# Altium PCB VFD LCD.PcbDoc
Units mm, origin at the board's own origin, x right, y up, seen from the top; angles counter-clockwise.
Board outline 150.37 x 53.47 mm, 2 copper layers (Top Layer, Bottom Layer), stack 1.671 mm thick; 69 components, 46 nets, 247 pads, 80 vias.
Unrouted connection lines stored in the file: 128.
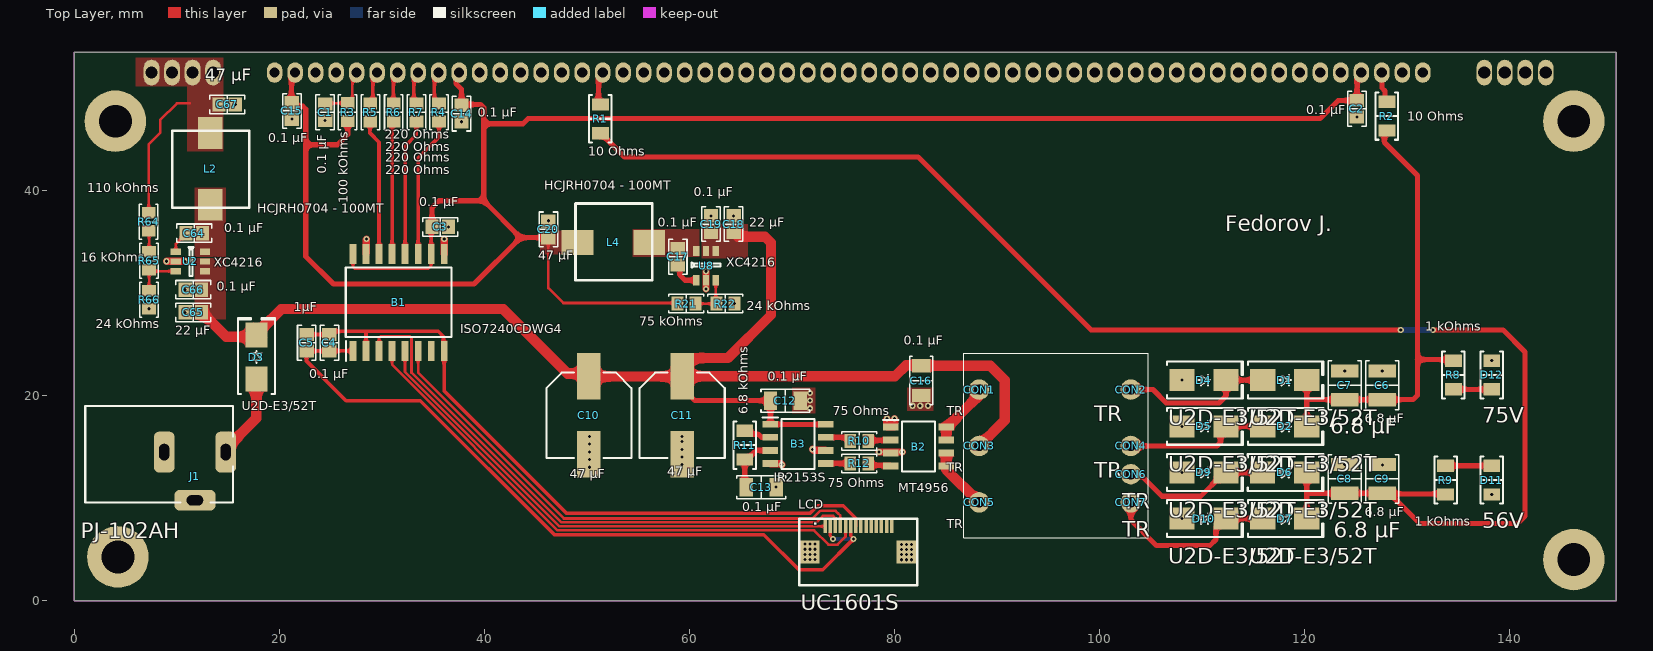
[diagram p0: Top Layer view]
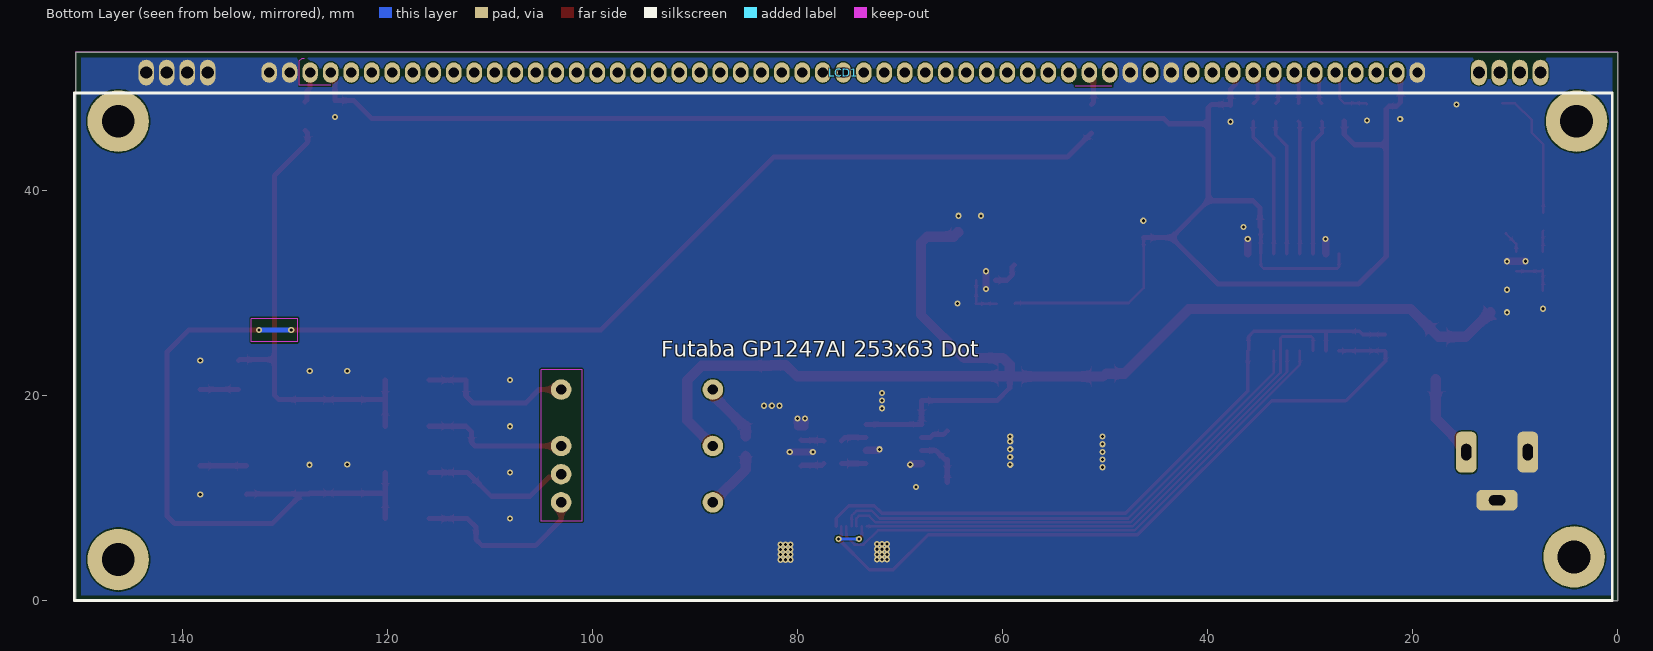
[diagram p1: Bottom Layer view, seen from below]
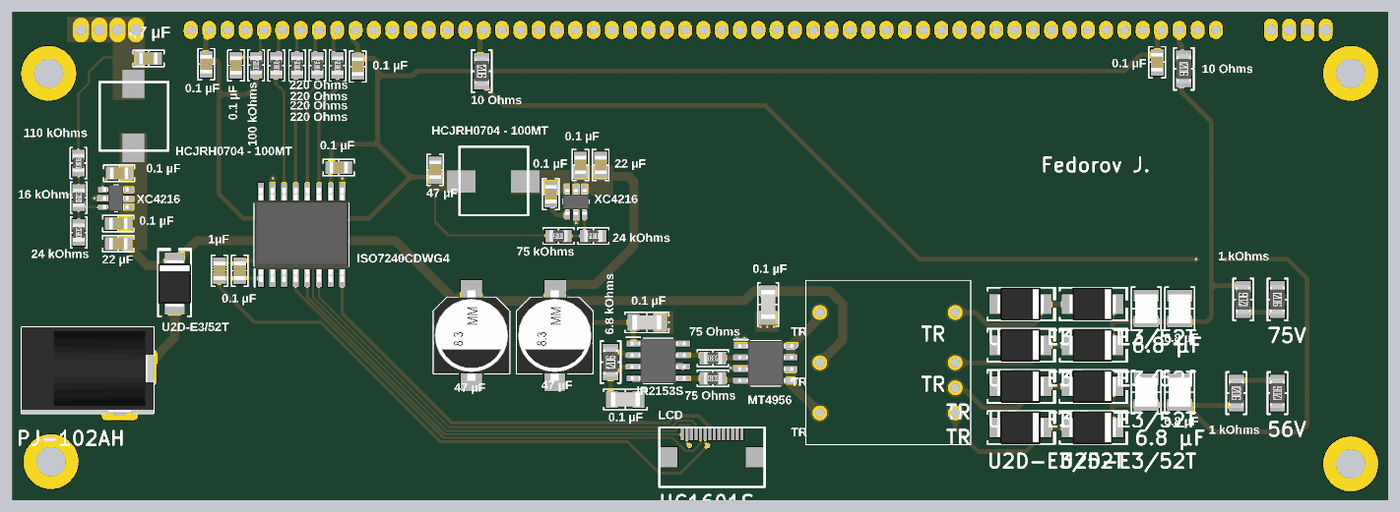
[diagram p2: 3D render of the assembled board from above, using the file's embedded part models]

## Layer stack, top to bottom
Top Solder: solder mask 0.0102, Solder Resist, Dk 3.5
Top Layer: signal copper 0.0356
Dielectric 1: dielectric 1.6, FR-4, Dk 4.8
Bottom Layer: signal copper 0.0356
Bottom Solder: solder mask 0.0102, Solder Resist, Dk 3.5

## Board outline
0,0 0,53.467 150.368,53.467 150.368,0

## Design rules (kind name [scope] priority, off if disabled: settings)
AssemblyTestPointUsage [All] p1 off:
AssemblyTestpoint [All] p1 off: testpointundercomponent=TRUE minsize=1.016 maxsize=2.54 preferedsize=1.524 minholesize=0 maxholesize=1.016 preferedholesize=0.813 testpointgrid=0.025 usegrid=TRUE gridtolerance=0 allowsidetop=TRUE allowsidebottom=TRUE
BoardOutlineClearance [All] p1: gap=0.5 ignorepadtopadclearanceinfootprint=FALSE
Clearance [All] p1: gap=0.127 ignorepadtopadclearanceinfootprint=FALSE
ComponentClearance [All] p1: gap=0.254 collisioncheckmode=3 verticalgap=-0.254 showdistances=FALSE
FabricationTestPointUsage [All] p1 off: valid=0 allowmultiple=FALSE
FabricationTestpoint [All] p1 off: side=3 testpointundercomponent=TRUE minsize=1.016 maxsize=2.54 preferedsize=1.524 minholesize=0 maxholesize=1.016 preferedholesize=0.813 testpointgrid=0.025 allowsidetop=TRUE allowsidebottom=TRUE usegrid=TRUE gridtolerance=0
FanoutControl Fanout_Default [All] p1: bgadir=Out bgaviamode=Centered fanoutstyle=Auto fanoutdirection=Alternating viagrid=0.025 // Fanout_Default (Default Rule)
FanoutControl Fanout_Small [(CompPinCount < 5)] p2: bgadir=Out bgaviamode=Centered fanoutstyle=Auto fanoutdirection=OutThenIn viagrid=0.025 // Fanout_Small (Default Rule)
FanoutControl Fanout_LCC [IsLCC] p4: bgadir=Out bgaviamode=Centered fanoutstyle=Auto fanoutdirection=Alternating viagrid=0.025 // Fanout_LCC (Default Rule)
FanoutControl Fanout_BGA [IsBGA] p5: bgadir=Out bgaviamode=Centered fanoutstyle=Auto fanoutdirection=Alternating viagrid=0.025 // Fanout_BGA (Default Rule)
HoleSize [All] p1: absolutevalues=TRUE maxlimit=2.54 minlimit=0.3 maxpercent=80.000 minpercent=20.000
HoleToHoleClearance [All] p1: gap=0.5 allowstackedmicrovias=TRUE
MinimumAnnularRing [All] p1: minimumring=0.128
PolygonConnect [All] p1: connectstyle=Direct reliefconductorwidth=0.254 reliefentries=4 polygonreliefangle="90 Angle" airgapwidth=0.254
RoutingVias [All] p1: holewidth=0.3 width=0.3 viastyle="Through Hole" minholewidth=0.3 minwidth=0.8 maxholewidth=4 maxwidth=4
SilkToSolderMaskClearance [IsPad] p1: minsilkscreentomaskgap=0.128 clearancetoexposedcopper=TRUE
SolderMaskExpansion [All] p1: expansion=0.102 istentingtop=FALSE
SolderMaskExpansion SolderMaskExpansion_GNDVIA [IsVia and InNet('GND')] p2: expansion=0.102 istentingtop=TRUE
SupplyNets "Schematic Supply Nets_9" [InNet('+3.3')] p1: voltage=0.000
SupplyNets "Schematic Supply Nets_8" [InNet('GND')] p2: voltage=0.000
SupplyNets "Schematic Supply Nets_7" [InNet('+75')] p3: voltage=0.000
SupplyNets "Schematic Supply Nets_6" [InNet('+12')] p4: voltage=0.000
SupplyNets "Schematic Supply Nets_5" [InNet('LCD_GND')] p5: voltage=0.000
SupplyNets "Schematic Supply Nets_4" [InNet('+5')] p6: voltage=0.000
SupplyNets "Schematic Supply Nets_3" [InNet('3V3_ISO')] p7: voltage=0.000
SupplyNets "Schematic Supply Nets_2" [InNet('GND_ISO')] p8: voltage=0.000
SupplyNets "Schematic Supply Nets_1" [InNet('VLCD')] p9: voltage=0.000
SupplyNets "Schematic Supply Nets" [InNet('+55')] p10: voltage=0.000
UnRoutedNet [All] p1: checkbadconnections=TRUE
Width [All] p1: maxlimit=4 minlimit=0.254 preferedwidth=0.4 minimp=50.000000 maximp=50.000000 favimp=50.000000
17 further rules are at their usual default settings.

## Classes and differential pairs
component class "VFD LCD": B1 B2 B3 C1 C2 C3 C4 C5 C6 C7 C8 C9 C10 C11 C12 C13 C14 C15 C16 CON1 CON2 CON3 CON4 CON5 CON6 CON7 D1 D2 D3 D4 D5 D6 D7 D9 D10 D11 D12 J1 LCD LCD1 R1 R2 R3 R4 R5 R6 R7 R8 R9 R10 R11 R12
component class U_XC4216_DC_DC5V: C64 C65 C66 C67 L2 R64 R65 R66 U2
component class U_XC4216_DC_DC3.3V: C17 C18 C19 C20 L4 R21 R22 U8

## Components (designator, comment, footprint, x,y, rotation, side; value= is the part's Value field where it differs from the comment)
B1 "ISO7240CDWG4" SOIC127P1030X265-16N 31.623,29.083 r90 top
B2 "MT4956" SOIC127P600X175-8N 82.341,15.022 r0 top
B3 "IR2153S" SOIC127P600X175-8N 70.593,15.276 r0 top
C1 "0.1 µF" "CAP 0805_2012" 24.457,47.625 r90 top
C2 "0.1 µF" "CAP 0805_2012" 125.095,47.968 r90 top
C3 "0.1 µF" "CAP 0805_2012" 35.687,36.449 r0 top
C4 "0.1 µF" "CAP 0805_2012" 24.869,25.146 r90 top
C5 "1µF" "CAP 0805_2012" 22.664,25.146 r270 top
C6 "6.8 µF" "CAP 1210_3225 - 1MM" 127.568,20.991 r270 top
C7 "6.8 µF" "CAP 1210_3225 - 1MM" 123.913,20.991 r270 top
C8 "6.8 µF" "CAP 1210_3225 - 1MM" 123.913,11.864 r270 top
C9 "6.8 µF" "CAP 1210_3225 - 1MM" 127.568,11.864 r270 top
C10 "47 µF" "CAP ALSMD 8.3MM H10.5MM" 50.186,18.07 r270 top
C11 "47 µF" "CAP ALSMD 8.3MM H10.5MM" 59.29,18.07 r270 top
C12 "0.1 µF" "CAP 1206_3216 - 0.8MM" 69.35,19.495 r180 top
C13 "0.1 µF" "CAP 1206_3216 - 0.8MM" 67,11.057 r180 top
C14 "0.1 µF" "CAP 0805_2012" 37.764,47.498 r90 top
C15 "0.1 µF" "CAP 0805_2012" 21.209,47.752 r90 top
C16 "0.1 µF" "CAP 1206_3216 - 0.8MM" 82.6,21.45 r90 top
C17 "0.1 µF" "CAP 0805_2012" 58.857,33.528 r90 top
C18 "22 µF" "CAP 0805_2012" 64.307,36.723 r270 top
C19 "0.1 µF" "CAP 0805_2012" 62.103,36.723 r270 top
C20 "47 µF" "CAP 0805_2012" 46.228,36.195 r270 top
C64 "0.1 µF" "CAP 0805_2012" 11.693,35.824 r0 top
C65 "22 µF" "CAP 0805_2012" 11.604,28.112 r0 top
C66 "0.1 µF" "CAP 0805_2012" 11.604,30.316 r0 top
C67 "47 µF" "CAP 0805_2012" 14.906,48.383 r180 top
CON1 "TR" "one contact 0,8_1.6" 88.25,20.575 r90 top
CON2 "TR" "one contact 0,8_1.6" 103.05,20.575 r90 top
CON3 "TR" "one contact 0,8_1.6" 88.25,15.075 r90 top
CON4 "TR" "one contact 0,8_1.6" 103.05,15.075 r90 top
CON5 "TR" "one contact 0,8_1.6" 88.25,9.575 r90 top
CON6 "TR" "one contact 0,8_1.6" 103.05,12.325 r90 top
CON7 "TR" "one contact 0,8_1.6" 103.05,9.575 r90 top
D1 "U2D-E3/52T" "DO214AA SMB" 118.059,21.499 r0 top
D2 "U2D-E3/52T" "DO214AA SMB" 118.059,16.995 r0 top
D3 "U2D-E3/52T" "DO214AA SMB" 17.75,23.75 r90 top
D4 "U2D-E3/52T" "DO214AA SMB" 110.18,21.499 r0 top
D5 "U2D-E3/52T" "DO214AA SMB" 110.18,16.995 r0 top
D6 "U2D-E3/52T" "DO214AA SMB" 118.05,12.49 r0 top
D7 "U2D-E3/52T" "DO214AA SMB" 118.059,7.986 r0 top
D9 "U2D-E3/52T" "DO214AA SMB" 110.171,12.49 r0 top
D10 "U2D-E3/52T" "DO214AA SMB" 110.171,7.986 r0 top
D11 "56V" "RES 1206_3216" 138.25,11.75 r90 top value="1 kOhms"
D12 "75V" "RES 1206_3216" 138.25,22 r270 top value="1 kOhms"
J1 "PJ-102AH" "CUI PJ-102AH" 8.263,14.478 r90 top
L2 "HCJRH0704 - 100MT" "HCJRH0704 - 100MT" 13.255,42.104 r90 top
L4 "HCJRH0704 - 100MT" "HCJRH0704 - 100MT" 52.578,34.925 r180 top
LCD "UC1601S" FPC0514 76.222,7.235 r90 top
LCD1 "GP1247AI" GP1247AI 77.528,47.5 r180 bottom
R1 "10 Ohms" "RES 1206_3216" 51.308,46.99 r270 top
R2 "10 Ohms" "RES 1206_3216" 128.016,47.244 r270 top
R3 "100 kOhms" "RES 0805_2012" 26.661,47.639 r90 top
R4 "220 Ohms" "RES 0805_2012" 35.56,47.611 r90 top
R5 "220 Ohms" "RES 0805_2012" 28.865,47.611 r90 top
R6 "220 Ohms" "RES 0805_2012" 31.151,47.611 r90 top
R7 "220 Ohms" "RES 0805_2012" 33.356,47.611 r90 top
R8 "1 kOhms" "RES 1206_3216" 134.5,22 r90 top
R9 "1 kOhms" "RES 1206_3216" 133.75,11.75 r270 top
R10 "75 Ohms" "RES 0805_2012" 76.562,15.575 r0 top
R11 "6.8 kOhms" "RES 1206_3216" 65.386,15.149 r90 top
R12 "75 Ohms" "RES 0805_2012" 76.562,13.371 r0 top
R21 "75 kOhms" "RES 0805_2012" 59.696,28.956 r180 top
R22 "24 kOhms" "RES 0805_2012" 63.5,28.956 r180 top
R64 "110 kOhms" "RES 0805_2012" 7.25,36.942 r90 top
R65 "16 kOhms" "RES 0805_2012" 7.286,33.137 r90 top
R66 "24 kOhms" "RES 0805_2012" 7.286,29.333 r90 top
U2 "XC4216" SOT-23-6 10.372,34.02 r0 top
U8 "XC4216" SOT-23-6 60.662,31.717 r90 top

## Footprints (in the part's own frame and the unit in brackets; to place one, negate y for a bottom-side part, rotate by r counter-clockwise, add the part's x,y. Pads: shape width x height; smd on the part's side, far side on the other; paste and mask are expansions set on the pad)
"CAP 0805_2012" [mm] "Chip Capacitor, 2-Leads, Body 2.00x1.20mm, IPC Medium Density"
  rect 1.3x1.4 smd: 1(-0.8,0) 2(0.8,0)
  silkscreen extent -1.7,-0.9 1.7,0.9, body extent -1,-0.64 1,0.64, height 1.26
"CAP 1206_3216 - 0.8MM" [mm] "Chip Capacitor, 2-Leads, Body 3.25x1.60mm, IPC Medium Density"
  rect 1.3x1.8 smd: 1(-1.45,0) 2(1.45,0)
  silkscreen extent -2.37,-1.12 2.37,1.12, body extent -1.6,-0.8 1.6,0.8, height 0.8
"CAP 1210_3225 - 1MM" [mm] "Chip Capacitor, 2-Leads, Body 3.20x2.50mm, IPC Medium Density"
  rect 1.3x2.7 smd: 1(-1.4,0) 2(1.4,0)
  silkscreen extent -2.37,-1.63 2.37,1.63, body extent -1.6,-1.25 1.6,1.25, height 1
"CAP ALSMD 8.3MM H10.5MM" [mm] "Aluminum Electrolytic Capacitor, Body 8.30x8.30x10.50mm, IPC Low Density"
  rect 4.55x2.3 smd: 1(-3.8,0) 2(3.8,0)
  silkscreen extent -4.15,-4.15 4.15,4.15, body extent -4.95,-4.15 4.95,4.15, height 10.5
"CUI PJ-102AH" [mm] "DC Barrel Jack W/ Switch 2.0x5.5"
  rrect50% 4x2 hole 1 slot 1.6 at 0 deg: 1(0,-6.5) 2(0,-0.5)
  rrect50% 2x4 hole 1 slot 1.6 at 90 deg: 3(-4.7,-3.5)
  silkscreen extent -4.92,-7.2 4.47,7.2, body extent -4.92,-7.2 4.47,7.2, height 11
"DO214AA SMB" [mm] "Molded Diode, 2-Leads, Body 4.31x3.62mm, IPC Medium Density"
  rect 2.45x2.15 smd: 1(-2.15,0) 2(2.15,0)
  silkscreen extent -3.6,-1.8 3.8,1.8, body extent -2.6,-1.8 2.6,1.8, height 2.4
FPC0514 [mm] "Connector"
  rect 1.3x0.35 smd: 1(0,3) 2(0,2.5) 3(0,2) 4(0,1.5) 5(0,1) 6(0,0.5) 7(0,0) 8(0,-0.5) 9(0,-1) 10(0,-1.5) 11(0,-2) 12(0,-2.5) 13(0,-3) 14(0,-3.5)
  rect 2.2x1.9 smd: 15(-2.5,4.5) 15(-2.5,-4.9)
  silkscreen extent -5.75,-6 0.75,5.5, body extent -5.88,-5.9 0.88,5.5, height 1.99
GP1247AI [mm] "Display"
  oval 1.524x2.5 hole 1.2: 1(70,4) 2(68,4) 3(66,4) 4(64,4) 62(-60,4) 63(-62,4) 64(-64,4) 65(-66,4)
  oval 1.524x2 hole 1: 5(58,4) 6(56,4) 7(54,4) 8(52,4) 9(50,4) 10(48,4) 11(46,4) 12(44,4) 13(42,4) 14(40,4) 15(38,4) 16(36,4) 17(34,4) 18(32,4) 19(30,4) 20(28,4) 21(26,4) 22(24,4) 23(22,4) 24(20,4) 25(18,4) 26(16,4) 27(14,4) 28(12,4) 29(10,4) 30(8,4) 31(6,4) 32(4,4) 33(2,4) 34(0,4) 35(-2,4) 36(-4,4) 37(-6,4) 38(-8,4) 39(-10,4) 40(-12,4) 41(-14,4) 42(-16,4) 43(-18,4) 44(-20,4) 45(-22,4) 46(-24,4) 47(-26,4) 48(-28,4) 49(-30,4) 50(-32,4) 51(-34,4) 52(-36,4) 53(-38,4) 54(-40,4) 55(-42,4) 56(-44,4) 57(-46,4) 58(-48,4) 59(-50,4) 60(-52,4) 61(-54,4)
  silkscreen extent -73,-47.5 77,2
"HCJRH0704 - 100MT" [mm] "Inductor 10UH Body 7.5*7.5*4.5mm"
  rect 3.1x2.4 smd paste+0 mask+0: 1(-3.5,0) 2(3.5,0)
  silkscreen extent -3.8,-3.8 3.7,3.7
"one contact 0,8_1.6" [mm]
  round 2 hole 1 mask-2539.97: 1(0,0)
"RES 0805_2012" [mm] "Chip Resistor, 2-Leads, Body 2.00x1.25mm, IPC Medium Density"
  rect 1.15x1.35 smd: 1(-0.875,0) 2(0.875,0)
  silkscreen extent -1.7,-0.9 1.7,0.9, body extent -1,-0.62 1,0.63, height 0.6
"RES 1206_3216" [mm] "Chip Resistor, 2-Leads, Body 3.13x1.55mm, IPC Medium Density"
  rect 1.2x1.65 smd: 1(-1.4,0) 2(1.4,0)
  silkscreen extent -2.3,-1.1 2.3,1.1, body extent -1.6,-0.8 1.6,0.8, height 0.6
SOIC127P600X175-8N [mm]
  rect 1.525x0.65 smd: 1(-2.712,1.905) 2(-2.712,0.635) 3(-2.712,-0.635) 4(-2.712,-1.905) 5(2.712,-1.905) 6(2.712,-0.635) 7(2.712,0.635) 8(2.712,1.905)
  silkscreen extent -3.47,-2.44 1.6,2.58, body extent -3,-2.44 3,2.44, height 1.75
SOIC127P1030X265-16N [mm]
  rect 1.95x0.65 smd: 1(-4.725,4.445) 2(-4.725,3.175) 3(-4.725,1.905) 4(-4.725,0.635) 5(-4.725,-0.635) 6(-4.725,-1.905) 7(-4.725,-3.175) 8(-4.725,-4.445) 9(4.725,-4.445) 10(4.725,-3.175) 11(4.725,-1.905) 12(4.725,-0.635) 13(4.725,0.635) 14(4.725,1.905) 15(4.725,3.175) 16(4.725,4.445)
  silkscreen extent -5.7,-5.15 3.4,5.15, body extent -5.17,-5.15 5.17,5.15, height 2.59
SOT-23-6 [mm]
  rect 1x0.6 smd: 1(-0.475,0) 2(-0.475,-0.95) 3(-0.475,-1.9) 4(2.375,-1.9) 5(2.375,-0.95) 6(2.375,0)
  silkscreen extent 0.76,-2.38 1.24,0.48, body extent -0.44,-2.36 2.36,0.49, height 1.35

## Part data
B1: "Digital Isolator CMOS 4-CH 25Mbps 16-Pin SOIC Tube", Manufacturer_Name="Texas Instruments", Mouser Part Number=595-ISO7240CDWG4, Arrow Part Number=ISO7240CDWG4, Arrow Price/Stock=https://www.arrow.com/en/products/iso7240cdwg4/texas-instruments, Datasheet Link=https://www.ti.com/lit/ds/symlink/iso7240c.pdf?ts=1635751768423&ref_url=https%253A%252F%252Fwww.ti.com%252Fproduct%252FISO7240C, Geometry.Height=2.65mm, Manufacturer_Part_Number=ISO7240CDWG4, Mouser Price/Stock=https://www.mouser.co.uk/ProductDetail/Texas-Instruments/ISO7240CDWG4?qs=IUbkBnfnSQLQBn7aUd6cPA%3D%3D
B2: "N-Channel PowerTrench® MOSFET / 60V, 5A, mΩ", Manufacturer_Name=Infineon, Manufacturer_Part_Number=IR2153S, Datasheet Link=http://www.infineon.com/dgdl/ir2153.pdf?fileId=5546d462533600a4015355c8c5fc16af, Geometry.Height=1.75mm
B3: "Self-Oscillating 600 V Half Bridge Driver IC with typical 0 A source and 0 A sink currents in 8 Lead SOIC package for IGBTs and MOSFETs. Also available in 8 Lead PDIP.", Manufacturer_Name=Infineon, Datasheet Link=http://www.infineon.com/dgdl/ir2153.pdf?fileId=5546d462533600a4015355c8c5fc16af, Geometry.Height=1.75mm, Manufacturer_Part_Number=IR2153S
C1 C2 C3 C4 C14 C15 C17 C19 C64 C66: library part CC0805MRX7R9BB104, "CAP CER 0.1UF 50V X7R 0805", Device Package="0805 (2012 Metric)", Manufacturer=Yageo, Operating Temperature="-55°C ~ 125°C", Supplier Part Number 1=311-4351-1-ND, Temperature Coefficient=X7R, Tolerance=±20%, Voltage - Rated=50V, Applications="General Purpose", Capacitance="0.1 µF", ComponentLink1Description=Datasheet, ComponentLink1URL=https://www.yageo.com/upload/media/product/productsearch/datasheet/mlcc/UPY-GPHC_X7R_6.3V-to-50V_18.pdf, componentlink2description="DigiKey Link", componentlink2url=https://www.digikey.com/en/products/detail/yageo/CC0805MRX7R9BB104/5884281, Lifecycle Status=Active, Minimum Order=1, Mounting Type="Surface Mount, MLCC", Package / Case="0805 (2012 Metric)", packaging=TapeAndReel, Part Number=CC0805MRX7R9BB104, Part Status=Active, partid=2475, Price=0.01, series=CC, Size / Dimension="0.079\" L x 0.049\" W (2.00mm x 1.25mm)", Supplier 1=DigiKey, Thickness (Max)="0.037\" (0.95mm)"
  C1 C2 C3 C4 C14 C15 C17 C19: lastupdated="8/26/2023 7:12:59 PM"
  C64 C66: lastupdated="2/9/2024 20:16:09"
C5: library part MM05ZC105KCZ2A, "CAP CER 1UF 10V X7R 0805", Device Package="0805 (2012 Metric)", Manufacturer="AVX Corporation", Operating Temperature="-55°C ~ 125°C", Supplier Part Number 1=478-10611-1-ND, Temperature Coefficient=X7R, Tolerance=±10%, Voltage - Rated=10V, Applications="Medical, Non-Critical", Capacitance=1µF, ComponentLink1Description=Datasheet, ComponentLink1URL=http://datasheets.avx.com/AVX-MM.pdf, componentlink2description="DigiKey Link", componentlink2url=http://digikey.com/product-detail/en/avx-corporation/MM05ZC105KCZ2A/478-10611-1-ND/7344872, lastupdated="9/2/2020 1:04:42 AM", Lifecycle Status=Active, Minimum Order=1, Mounting Type="Surface Mount, MLCC", Package / Case="0805 (2012 Metric)", packaging=TapeAndReel, Part Number=MM05ZC105KCZ2A, Part Status=Active, partid=2439, Price=0.50, series=MM, Size / Dimension="0.079\" L x 0.049\" W (2.01mm x 1.25mm)", Supplier 1=DigiKey, Thickness (Max)="0.029\" (0.74mm)"
C6 C7 C8 C9: library part CGA6P3X7S1H685K250AB, "CAP CER 6.8UF 50V X7S 1210", Device Package="1210 (3225 Metric)", Manufacturer="TDK Corporation", Operating Temperature="-55°C ~ 125°C", Ratings=AEC-Q200, Supplier Part Number 1=445-7003-1-ND, Temperature Coefficient=X7S, Tolerance=±10%, Voltage - Rated=50V, Applications=Automotive, Capacitance="6.8 µF", ComponentLink1Description=Datasheet, ComponentLink1URL=https://product.tdk.com/info/en/catalog/datasheets/mlcc_automotive_general_en.pdf?ref_disty=digikey, componentlink2description="DigiKey Link", componentlink2url=https://www.digikey.com/en/products/detail/tdk-corporation/CGA6P3X7S1H685K250AB/2672896, lastupdated="6/4/2024 7:21:03 PM", Lifecycle Status=Active, Minimum Order=1, Mounting Type="Surface Mount, MLCC", Package / Case="1210 (3225 Metric)", packaging=TapeAndReel, Part Number=CGA6P3X7S1H685K250AB, Part Status=Active, partid=23852, Price=0.32, series=CGA, Size / Dimension="0.126\" L x 0.098\" W (3.20mm x 2.50mm)", Supplier 1=DigiKey, Thickness (Max)="0.110\" (2.80mm)"
C10 C11: library part 63SGV47M8X10.5, "CAP ALUM 47UF 20% 63V SMD", Device Package="Radial, Can - SMD", Lifetime @ Temp.="2000 Hrs @ 105°C", Manufacturer=Rubycon, Operating Temperature="-40°C ~ 105°C", Ratings=AEC-Q200, Ripple Current @ High Frequency="180 mA @ 10 kHz", Ripple Current @ Low Frequency="120 mA @ 120 Hz", Supplier Part Number 1=1189-2505-1-ND, Tolerance=±20%, Voltage - Rated="63 V", Applications=Automotive, Capacitance="47 µF", ComponentLink1Description=Datasheet, ComponentLink1URL=http://www.rubycon.co.jp/en/catalog/e_pdfs/aluminum/e_sgv.pdf, componentlink2description="DigiKey Link", componentlink2url=https://www.digikey.com/en/products/detail/rubycon/63SGV47M8X10-5/3568703, Height - Seated (Max)="0.413\" (10.50mm)", lastupdated="8/26/2023 8:37:59 PM", Lifecycle Status=Active, Minimum Order=1, Mounting Type="Surface Mount", Package / Case="Radial, Can - SMD", packaging=TapeAndReel, Part Number=63SGV47M8X10.5, Part Status=Active, partid=7644, Polarization=Polar, Price=0.20, series=SGV, Size / Dimension="0.315\" Dia (8.00mm)", Supplier 1=DigiKey, Surface Mount Land Size="0.327\" L x 0.327\" W (8.30mm x 8.30mm)"
C12 C13 C16: library part CC1206MRY5V9BB104, "CAP CER 0.1UF 50V Y5V 1206", Device Package="1206 (3216 Metric)", Manufacturer=Yageo, Operating Temperature="-30°C ~ 85°C", Supplier Part Number 1=311-4504-1-ND, Temperature Coefficient="Y5V (F)", Tolerance=±20%, Voltage - Rated=50V, Applications="General Purpose", Capacitance="0.1 µF", ComponentLink1Description=Datasheet, ComponentLink1URL=http://www.yageo.com/documents/recent/UPY-GPHC_Y5V_6.3V-to-50V_8.pdf, componentlink2description="DigiKey Link", componentlink2url=https://www.digikey.com/en/products/detail/yageo/CC1206MRY5V9BB104/5884674, lastupdated="6/4/2024 7:10:39 PM", Lifecycle Status=Active, Minimum Order=1, Mounting Type="Surface Mount, MLCC", Package / Case="1206 (3216 Metric)", packaging=TapeAndReel, Part Number=CC1206MRY5V9BB104, Part Status=Active, partid=18711, Price=0.04, series=CC, Size / Dimension="0.126\" L x 0.063\" W (3.20mm x 1.60mm)", Supplier 1=DigiKey, Thickness (Max)="0.028\" (0.70mm)"
C18 C65: library part C2012X6S0J226M125AB, "CAP CER 22UF 6.3V X6S 0805", Device Package="0805 (2012 Metric)", Manufacturer="TDK Corporation", Operating Temperature="-55°C ~ 105°C", Supplier Part Number 1=445-7620-1-ND, Temperature Coefficient=X6S, Tolerance=±20%, Voltage - Rated=6.3V, Applications="General Purpose", Capacitance="22 µF", ComponentLink1Description=Datasheet, ComponentLink1URL=https://product.tdk.com/info/en/catalog/datasheets/mlcc_commercial_general_en.pdf?ref_disty=digikey, componentlink2description="DigiKey Link", componentlink2url=https://www.digikey.com/en/products/detail/tdk-corporation/C2012X6S0J226M125AB/2733055, Features="Low ESL", Lifecycle Status=Active, Minimum Order=1, Mounting Type="Surface Mount, MLCC", Package / Case="0805 (2012 Metric)", packaging=TapeAndReel, Part Number=C2012X6S0J226M125AB, Part Status=Active, partid=3393, Price=0.13, series=C, Size / Dimension="0.079\" L x 0.049\" W (2.00mm x 1.25mm)", Supplier 1=DigiKey, Thickness (Max)="0.057\" (1.45mm)"
  C18: lastupdated="8/26/2023 7:12:49 PM"
  C65: lastupdated="2/9/2024 20:16:06"
C20 C67: library part AMK212BBJ476MD-T, "CAP CER 47UF 4V X5R 0805", Device Package="0805 (2012 Metric)", Manufacturer="Taiyo Yuden", Operating Temperature="-55°C ~ 85°C", Supplier Part Number 1=587-5399-1-ND, Temperature Coefficient=X5R, Tolerance=±20%, Voltage - Rated=4V, Applications="SMPS Filtering", Capacitance="47 µF", ComponentLink1Description=Datasheet, ComponentLink1URL="https://ds.yuden.co.jp/TYCOMPAS/ut/detail?pn=AMK212BBJ476MD-T &u=M", componentlink2description="DigiKey Link", componentlink2url=https://www.digikey.com/en/products/detail/taiyo-yuden/AMK212BBJ476MD-T/7066986, Lifecycle Status=Active, Minimum Order=1, Mounting Type="Surface Mount, MLCC", Package / Case="0805 (2012 Metric)", packaging=TapeAndReel, Part Number=AMK212BBJ476MD-T, Part Status=Active, partid=3321, Price=0.12, series=M, Size / Dimension="0.079\" L x 0.049\" W (2.00mm x 1.25mm)", Supplier 1=DigiKey, Thickness (Max)="0.037\" (0.95mm)"
  C20: lastupdated="8/26/2023 7:12:50 PM"
  C67: lastupdated="2/9/2024 20:16:07"
CON1 CON2 CON3 CON4 CON5 CON6 CON7: library part ONE_Contact, "ONE_Contact"
D1 D2 D3 D4 D5 D6 D7 D9 D10: "DIODE GEN PURP 200V 2A DO214AA", Current - Average Rectified (Io)=2A, Current - Reverse Leakage @ Vr="10µA @ 200V", Manufacturer="Vishay Semiconductor Diodes Division", Operating Temperature - Junction="-55°C ~ 150°C", Package / Case="DO-214AA, SMB", Supplier Device Package="DO-214AA (SMB)", Supplier Part Number 1=U2D-E3/52TGICT-ND, Voltage - DC Reverse (Vr) (Max)=200V, Voltage - Forward (Vf) (Max) @ If="900mV @ 2A", ComponentLink1Description=Datasheet, ComponentLink1URL=http://www.vishay.com/docs/89096/u2d.pdf, componentlink2description="DigiKey Link", componentlink2url=http://digikey.com/product-detail/en/vishay-semiconductor-diodes-division/U2D-E3-52T/U2D-E3-52TGICT-ND/9601335, Diode Type=Standard, lastupdated="6/3/2024 7:53:59 PM", Lifecycle Status=Active, Minimum Order=1, Mounting Type="Surface Mount", packaging=TapeAndReel, Part Number=U2D-E3/52T, Part Status=Active, partid=160, Price=0.19, Reverse Recovery Time (trr)=27ns, series=-, Speed="Fast Recovery =< 500ns, > 200mA (Io)", Supplier 1=DigiKey
D11 D12: library part RNCS1206BKE1K00, "RES 1K OHM 0.1% 1/8W 1206", Device Package="1206 (3216 Metric)", Manufacturer="Stackpole Electronics Inc", Operating Temperature="-55°C ~ 155°C", Power (Watts)="0.125W, 1/8W", Ratings=AEC-Q200, Resistance="1 kOhms", Supplier Device Package=1206, Supplier Part Number 1=RNCS1206BKE1K00CT-ND, Temperature Coefficient=±25ppm/°C, Tolerance=±0.1%, ComponentLink1Description=Datasheet, ComponentLink1URL=https://www.seielect.com/catalog/sei-rncs_rnch.pdf, componentlink2description="DigiKey Link", componentlink2url=https://www.digikey.com/en/products/detail/stackpole-electronics-inc/RNCS1206BKE1K00/1800333, Composition="Thin Film", Features="Anti-Corrosive, Automotive AEC-Q200, Moisture Resistant", Height - Seated (Max)="0.026\" (0.65mm)", lastupdated="2/9/2024 8:54:46 PM", Lifecycle Status=Active, Minimum Order=1, Number of Terminations=2, Package / Case="1206 (3216 Metric)", packaging=TapeAndReel, Part Number=RNCS1206BKE1K00, Part Status=Active, partid=26856, Price=0.08, series=RNCS, Size / Dimension="0.120\" L x 0.061\" W (3.05mm x 1.55mm)", Supplier 1=DigiKey
J1: "CONN PWR JACK 2X5.5MM SOLDER", Current Rating (Amps)=5A, Manufacturer="CUI Devices", Material Flammability Rating="UL94 V-0", Supplier Part Number 1=CP-102AH-ND, Voltage - Rated=24VDC, Actual Diameter="0.079\" (2.00mm ID), 0.256\" (6.50mm OD)", ComponentLink1Description=Datasheet, ComponentLink1URL=https://www.cuidevices.com/product/resource/digikeypdf/pj-102ah.pdf, componentlink2description="DigiKey Link", componentlink2url=//digikey.com/product-detail/en/cui-devices/PJ-102AH/CP-102AH-ND/408448, Connector Type=Jack, Gender=Male, Industry Recognized Mating Diameter="2.00mm ID (0.079\"), 5.50mm OD (0.217\")", Internal Switch(s)="Single Switch, Normally Closed", lastupdated="12/16/2019 7:01:27 PM", Lifecycle Status=0, Mating Length/Depth="0.354\" (9.00mm)", Minimum Order=1, Mounting Type="Through Hole, Right Angle", Number of Positions/Contacts="2 Conductors, 3 Contacts", packaging=Tray, Part Number=PJ-102AH, Part Status=Active, Price=0.76, series=-, Shielding=Unshielded, Supplier 1=DigiKey, System=Connector, Termination=Solder
L2 L4: "Inductor 10UH"
LCD: "LCD 65*132", System=connector
R1 R2: library part RNCS1206BKE10R0, "RES 10 OHM 0.1% 1/8W 1206", Device Package="1206 (3216 Metric)", Manufacturer="Stackpole Electronics Inc", Operating Temperature="-55°C ~ 155°C", Power (Watts)="0.125W, 1/8W", Ratings=AEC-Q200, Supplier Device Package=1206, Supplier Part Number 1=RNCS1206BKE10R0CT-ND, Temperature Coefficient=±25ppm/°C, Tolerance=±0.1%, ComponentLink1Description=Datasheet, ComponentLink1URL=https://www.seielect.com/catalog/sei-rncs_rnch.pdf, componentlink2description="DigiKey Link", componentlink2url=https://www.digikey.com/en/products/detail/stackpole-electronics-inc/RNCS1206BKE10R0/1801459, Composition="Thin Film", Features="Anti-Corrosive, Automotive AEC-Q200, Moisture Resistant", Height - Seated (Max)="0.026\" (0.65mm)", lastupdated="2/9/2024 8:54:46 PM", Lifecycle Status=Active, Minimum Order=1, Number of Terminations=2, Package / Case="1206 (3216 Metric)", packaging=TapeAndReel, Part Number=RNCS1206BKE10R0, Part Status=Active, partid=26855, Price=0.08, Resistance="10 Ohms", series=RNCS, Size / Dimension="0.120\" L x 0.061\" W (3.05mm x 1.55mm)", Supplier 1=DigiKey
R3: library part CPF0805B100KE, "RES SMD 100K OHM 0.1% 1/10W 0805", Device Package="0805 (2012 Metric)", Manufacturer="TE Connectivity Passive Product", Operating Temperature="-55°C ~ 155°C", Power (Watts)="0.1W, 1/10W", Supplier Device Package=0805, Supplier Part Number 1=A106042CT-ND, Temperature Coefficient=±25ppm/°C, Tolerance=±0.1%, ComponentLink1Description=Datasheet, ComponentLink1URL=https://www.te.com/commerce/DocumentDelivery/DDEController?Action=srchrtrv&DocNm=1773200&DocType=DS&DocLang=English, componentlink2description="DigiKey Link", componentlink2url=https://www.digikey.com/en/products/detail/te-connectivity-passive-product/CPF0805B100KE/2389788, Composition="Thin Film", Height - Seated (Max)="0.026\" (0.65mm)", lastupdated="8/26/2023 7:54:23 PM", Lifecycle Status=Active, Minimum Order=1, Number of Terminations=2, Package / Case="0805 (2012 Metric)", packaging=TapeAndReel, Part Number=CPF0805B100KE, Part Status=Active, partid=27729, Price=0.09, Resistance="100 kOhms", series="CPF, Neohm", Size / Dimension="0.079\" L x 0.049\" W (2.00mm x 1.25mm)", Supplier 1=DigiKey
R4 R5 R6 R7: library part CRGP0805F220R, "RES 220 OHM 1% 1/3W 0805", Device Package="0805 (2012 Metric)", Manufacturer="TE Connectivity Passive Product", Operating Temperature="-55°C ~ 155°C", Power (Watts)="0.333W, 1/3W", Supplier Device Package=0805, Supplier Part Number 1=A130469CT-ND, Temperature Coefficient=±100ppm/°C, Tolerance=±1%, ComponentLink1Description=Datasheet, ComponentLink1URL=https://www.te.com/commerce/DocumentDelivery/DDEController?Action=srchrtrv&DocNm=9-1773463-9&DocType=DS&DocLang=English, componentlink2description="DigiKey Link", componentlink2url=https://www.digikey.com/en/products/detail/te-connectivity-passive-product/CRGP0805F220R/8577071, Composition="Thick Film", Features="Pulse Withstanding", Height - Seated (Max)="0.026\" (0.65mm)", lastupdated="8/26/2023 7:54:19 PM", Lifecycle Status=Active, Minimum Order=1, Number of Terminations=2, Package / Case="0805 (2012 Metric)", packaging=TapeAndReel, Part Number=CRGP0805F220R, Part Status=Active, partid=28799, Price=0.02, Resistance="220 Ohms", series=CRGP, Size / Dimension="0.079\" L x 0.049\" W (2.00mm x 1.25mm)", Supplier 1=DigiKey
R8 R9: library part RNCS1206BKE1K00, "RES 1K OHM 0.1% 1/8W 1206", Device Package="1206 (3216 Metric)", Manufacturer="Stackpole Electronics Inc", Operating Temperature="-55°C ~ 155°C", Power (Watts)="0.125W, 1/8W", Ratings=AEC-Q200, Supplier Device Package=1206, Supplier Part Number 1=RNCS1206BKE1K00CT-ND, Temperature Coefficient=±25ppm/°C, Tolerance=±0.1%, ComponentLink1Description=Datasheet, ComponentLink1URL=https://www.seielect.com/catalog/sei-rncs_rnch.pdf, componentlink2description="DigiKey Link", componentlink2url=https://www.digikey.com/en/products/detail/stackpole-electronics-inc/RNCS1206BKE1K00/1800333, Composition="Thin Film", Features="Anti-Corrosive, Automotive AEC-Q200, Moisture Resistant", Height - Seated (Max)="0.026\" (0.65mm)", lastupdated="2/9/2024 8:54:46 PM", Lifecycle Status=Active, Minimum Order=1, Number of Terminations=2, Package / Case="1206 (3216 Metric)", packaging=TapeAndReel, Part Number=RNCS1206BKE1K00, Part Status=Active, partid=26856, Price=0.08, Resistance="1 kOhms", series=RNCS, Size / Dimension="0.120\" L x 0.061\" W (3.05mm x 1.55mm)", Supplier 1=DigiKey
R10 R12: library part CPF0805B7R5E1, "RES SMD 7.5 OHM 0.1% 1/10W 0805", Device Package="0805 (2012 Metric)", Manufacturer="TE Connectivity Passive Product", Operating Temperature="-55°C ~ 155°C", Power (Watts)="0.1W, 1/10W", Resistance="7.5 Ohms", Supplier Device Package=0805, Supplier Part Number 1=A103244CT-ND, Temperature Coefficient=±25ppm/°C, Tolerance=±0.1%, ComponentLink1Description=Datasheet, ComponentLink1URL=https://www.te.com/commerce/DocumentDelivery/DDEController?Action=srchrtrv&DocNm=1773200&DocType=DS&DocLang=English, componentlink2description="DigiKey Link", componentlink2url=https://www.digikey.com/en/products/detail/te-connectivity-passive-product/CPF0805B7R5E1/2381982, Composition="Thin Film", Height - Seated (Max)="0.026\" (0.65mm)", lastupdated="2/8/2024 9:02:36 PM", Lifecycle Status=Active, Minimum Order=1, Number of Terminations=2, Package / Case="0805 (2012 Metric)", packaging=TapeAndReel, Part Number=CPF0805B7R5E1, Part Status=Active, partid=28455, Price=0.10, series="CPF, Neohm", Size / Dimension="0.079\" L x 0.049\" W (2.00mm x 1.25mm)", Supplier 1=DigiKey
R11: library part ERA-8ARW682V, "RES SMD 6.8K OHM 0.05% 1/4W 1206", Device Package="1206 (3216 Metric)", Manufacturer="Panasonic Electronic Components", Operating Temperature="-55°C ~ 155°C", Power (Watts)="0.25W, 1/4W", Ratings=AEC-Q200, Supplier Device Package=1206, Supplier Part Number 1=P6.8KCTCT-ND, Temperature Coefficient=±10ppm/°C, Tolerance=±0.05%, ComponentLink1Description=Datasheet, ComponentLink1URL=https://industrial.panasonic.com/cdbs/www-data/pdf/RDM0000/AOA0000C307.pdf, componentlink2description="DigiKey Link", componentlink2url=https://www.digikey.com/en/products/detail/panasonic-electronic-components/ERA-8ARW682V/5141131, Composition="Thin Film", Features="Automotive AEC-Q200", Height - Seated (Max)="0.028\" (0.70mm)", lastupdated="2/9/2024 8:54:41 PM", Lifecycle Status=Active, Minimum Order=1, Number of Terminations=2, Package / Case="1206 (3216 Metric)", packaging=TapeAndReel, Part Number=ERA-8ARW682V, Part Status=Active, partid=27483, Price=0.53, Resistance="6.8 kOhms", series=ERA-8A, Size / Dimension="0.126\" L x 0.063\" W (3.20mm x 1.60mm)", Supplier 1=DigiKey
R21: library part RMCF0805FT75K0, "RES 75K OHM 1% 1/8W 0805", Device Package="0805 (2012 Metric)", Manufacturer="Stackpole Electronics Inc", Operating Temperature="-55°C ~ 155°C", Power (Watts)="0.125W, 1/8W", Ratings=AEC-Q200, Supplier Device Package=0805, Supplier Part Number 1=RMCF0805FT75K0CT-ND, Temperature Coefficient=±100ppm/°C, Tolerance=±1%, ComponentLink1Description=Datasheet, ComponentLink1URL=https://www.seielect.com/catalog/sei-packaging.pdf, componentlink2description="DigiKey Link", componentlink2url=https://www.digikey.com/en/products/detail/stackpole-electronics-inc/RMCF0805FT75K0/1760535, Composition="Thick Film", Features="Automotive AEC-Q200", Height - Seated (Max)="0.026\" (0.65mm)", lastupdated="8/26/2023 7:54:04 PM", Lifecycle Status=Active, Minimum Order=1, Number of Terminations=2, Package / Case="0805 (2012 Metric)", packaging=CutTape, Part Number=RMCF0805FT75K0, Part Status=Active, partid=32475, Price=0.01, Resistance="75 kOhms", series=RMCF, Size / Dimension="0.079\" L x 0.049\" W (2.00mm x 1.25mm)", Supplier 1=DigiKey
R22 R66: library part TNPW080524K0BEEA, "RES 24K OHM 0.1% 1/8W 0805", Device Package="0805 (2012 Metric)", Manufacturer="Vishay Dale", Operating Temperature="-55°C ~ 155°C", Power (Watts)="0.125W, 1/8W", Ratings=AEC-Q200, Supplier Device Package=0805, Supplier Part Number 1=541-9860-1-ND, Temperature Coefficient=±25ppm/°C, Tolerance=±0.1%, ComponentLink1Description=Datasheet, ComponentLink1URL=http://www.vishay.com/docs/28758/tnpw_e3.pdf, componentlink2description="DigiKey Link", componentlink2url=https://www.digikey.com/en/products/detail/vishay-dale/TNPW080524K0BEEA/1607437, Composition="Thin Film", Features="Anti-Sulfur, Automotive AEC-Q200, Moisture Resistant", Height - Seated (Max)="0.022\" (0.55mm)", Lifecycle Status=Active, Minimum Order=1, Number of Terminations=2, Package / Case="0805 (2012 Metric)", packaging=TapeAndReel, Part Number=TNPW080524K0BEEA, Part Status=Active, partid=37819, Price=0.16, Resistance="24 kOhms", series="TNPW e3", Size / Dimension="0.079\" L x 0.049\" W (2.00mm x 1.25mm)", Supplier 1=DigiKey
  R22: lastupdated="8/26/2023 7:53:42 PM"
  R66: lastupdated="2/8/2024 21:01:56"
R64: library part CRCW0805110KFKEA, "RES SMD 110K OHM 1% 1/8W 0805", Device Package="0805 (2012 Metric)", Manufacturer="Vishay Dale", Operating Temperature="-55°C ~ 155°C", Power (Watts)="0.125W, 1/8W", Ratings=AEC-Q200, Supplier Device Package=0805, Supplier Part Number 1=541-110KCCT-ND, Temperature Coefficient=±100ppm/°C, Tolerance=±1%, ComponentLink1Description=Datasheet, ComponentLink1URL=http://www.vishay.com/docs/20035/dcrcwe3.pdf, componentlink2description="DigiKey Link", componentlink2url=https://www.digikey.com/en/products/detail/vishay-dale/CRCW0805110KFKEA/1175869, Composition="Thick Film", Features="Automotive AEC-Q200", Height - Seated (Max)="0.020\" (0.50mm)", lastupdated="2/8/2024 21:02:11", Lifecycle Status=Active, Minimum Order=1, Number of Terminations=2, Package / Case="0805 (2012 Metric)", packaging=TapeAndReel, Part Number=CRCW0805110KFKEA, Part Status=Active, partid=34096, Price=0.01, Resistance="110 kOhms", series=CRCW, Size / Dimension="0.079\" L x 0.049\" W (2.00mm x 1.25mm)", Supplier 1=DigiKey
R65: library part CRCW080516K0FKEA, "RES SMD 16K OHM 1% 1/8W 0805", Device Package="0805 (2012 Metric)", Manufacturer="Vishay Dale", Operating Temperature="-55°C ~ 155°C", Power (Watts)="0.125W, 1/8W", Ratings=AEC-Q200, Supplier Device Package=0805, Supplier Part Number 1=541-16.0KCCT-ND, Temperature Coefficient=±100ppm/°C, Tolerance=±1%, ComponentLink1Description=Datasheet, ComponentLink1URL=http://www.vishay.com/docs/20035/dcrcwe3.pdf, componentlink2description="DigiKey Link", componentlink2url=https://www.digikey.com/en/products/detail/vishay-dale/CRCW080516K0FKEA/1175772, Composition="Thick Film", Features="Automotive AEC-Q200", Height - Seated (Max)="0.020\" (0.50mm)", lastupdated="2/8/2024 21:02:17", Lifecycle Status=Active, Minimum Order=1, Number of Terminations=2, Package / Case="0805 (2012 Metric)", packaging=TapeAndReel, Part Number=CRCW080516K0FKEA, Part Status=Active, partid=32798, Price=0.01, Resistance="16 kOhms", series=CRCW, Size / Dimension="0.079\" L x 0.049\" W (2.00mm x 1.25mm)", Supplier 1=DigiKey

## Free pads (board coordinates)
  round 6 hole 3.2: 1(4,46.75) 2(4.25,4.25) 3(146.25,4) 4(146.25,46.75)

## Via types
v1: diameter 0.6, hole 0.3, Top Layer to Bottom Layer, tented both sides, 77 vias
v2: diameter 0.6, hole 0.3, Top Layer to Bottom Layer, 3 vias

## Nets (pads, with @x,y where several pads share a name; then routed paths per layer and width w, separated by ;. In a path a pad name is that pad's centre, name@x,y a point inside that pad or via, vN(x,y) a via of type N, cw(c..) or ccw(c..) an arc to the next point about the centre after c; other vN are vias at no path point)
3V3_ISO: B1.1 C4.1 C5.2 LCD.2 LCD.6 | length 73.2
  Top Layer w0.254: LCD.2 LCD.2 73.72,6.309 74,6.028 v2(74,6) ; LCD.6 75.722,6.309 76,6.031 v2(76,6)
  Top Layer w0.35: B1.1 27.166,24.346 C5.2 22.645,24.326 22.645,23.355 26.5,19.5 33.75,19.5 46.825,6.425 67.25,6.425 70.675,3 73,3 v2(76,6)
  Bottom Layer w0.254: v2(74,6) v2(76,6)
+3.3: B1.10 B1.16 C2.2 C3.1 C14.2 C15.2 C20.2 L4.2 LCD1.6 LCD1.14 LCD1.58 R3.1 R21.2 | length 199.1
  Top Layer w0.254: B1.16 27.178,32.534 27.327,32.385 34.544,32.385 34.798,32.639 B1.10 ; C20.2 46.228,30.48 47.692,29.016 58.761,29.016 R21.2
  Top Layer w0.35: B1.10 34.798,36.36 C3.1
  Top Layer w0.5: LCD1.6@21.118,51.689 21.163,51.643 21.163,48.597 21.554,48.207 22.275,48.207 22.568,47.915 22.568,44.45 ; R3.1 26.661,45.457 25.654,44.45 22.568,44.45 ; C3.1 34.887,38.316 35.56,38.989 39.929,38.989 ; LCD1.14@37.118,51.689 37.211,51.596 37.211,50.419 37.764,49.866 C14.2 37.853,48.387 39.624,48.387 39.929,48.082 39.929,46.5 ; C20.2 43.523,35.395 ; LCD1.58@125.118,51.689 125.106,51.678 125.106,48.779 C2.2 123.268,48.768 121.5,47 44.25,47 43.75,46.5 39.929,46.5 ; 22.568,44.45 22.568,33.566 25.273,30.861 38.989,30.861 43.523,35.395 ; 39.929,38.989 39.929,46.5 ; 39.929,38.989 43.523,35.395
+5: C67.2 L2.2 LCD1.1 LCD1.2 LCD1.3 LCD1.4 R64.2 | length 13.1
  Top Layer w0.254: R64.2 7.25,44.5 8.375,45.625 8.375,46.875 10,48.5 11.25,48.5
+12: B3.1 B3.8 C10.1 C11.1 C12.2 C16.2 C18.2 C19.2 C65.2 C66.2 CON3.1 D3.2 U2.4 U2.5 U8.4 U8.5 | length 132.7
  Top Layer w0.5: C11.1 59.29,21.85 59.29,20.745 60.54,19.495 C12.2 67.9,17.2 B3.1 B3.8
  Top Layer w1: C65.2 12.404,28.062 12.554,27.912 12.604,27.912 14.797,25.719 17.469,25.719 20.175,28.425 41.825,28.425 48.122,22.128 49.907,22.128 50.186,21.85 C11.1@59.29,21.85 ; C18.2 64.357,35.923 64.755,35.525 64.755,35.475 67.364,35.475 67.95,34.889 67.95,27.85 63.745,23.645 59.94,23.645 59.29,22.995 C11.1 80.045,21.87 81.125,22.95 82.55,22.95 C16.2 89.35,22.9 90.75,21.5 90.75,17.575 CON3.1
+55: C8.2 C9.2 D6.2 D7.2 R1.2 R9.2 | length 147.8
  Top Layer w0.5: R1.2 53.648,43.25 82.3,43.25 99.15,26.4 v1(129.375,26.4) ; D6.2 120.2,10.467 ; D7.2 120.2,7.995 120.2,10.467 ; v1(132.525,26.4) 139.35,26.4 141.5,24.25 141.5,8.25 140.75,7.5 131.231,7.5 C9.2@128.324,10.407 ; R9.2 133.693,10.407 C9.2@128.324,10.407 ; 120.2,10.467 120.203,10.464 C8.2 C9.2 127.624,10.407 C9.2@128.324,10.407
  Bottom Layer w0.5: v1(129.375,26.4) v1(132.525,26.4)
+75: C6.2 C7.2 D1.2 D2.2 R2.2 R8.2 | length 46.3
  Top Layer w0.5: D2.2 120.209,19.594 ; D1.2 120.209,19.594 ; R2.2 127.775,45.603 127.775,44.675 131,41.45 131,23.5 ; R8.2 134.4,23.5 131,23.5 ; 120.209,19.594 120.212,19.591 C7.2 C6.2 130.566,19.591 131,20.025 131,23.5
GND: C16.1 C18.1 C19.1 C20.1 R22.1 U8.2 | length 1.8
  Top Layer w0.7: v1(61.613,30.373) 61.619,30.379 v1(61.619,32.12)
  other v1: 64.375,28.956 46.267,37.041 62.103,37.523 64.307,37.523
GND_ISO: B1.2 B1.8 C4.2 C5.1 LCD.7 | length 67.6
  Top Layer w0.35: C5.1 C4.2 25.173,26.25 28.5,26.25 ; B1.2 28.448,26.198 28.5,26.25 ; LCD.7 76.222,8.028 75,9.25 72.5,9.25 71.75,8.5 48,8.5 36.068,20.432 B1.8 36,24.426 36,25.741 35.491,26.25 28.5,26.25
LCD_CS: B1.5 LCD.1 | length 49.3
  Top Layer w0.254: B1.5 32.25,24.35 32.25,22.289 47.304,7.235 LCD.1
LCD_GND: B1.9 B1.15 B2.1 B2.3 B3.4 B3.6 C1.1 C2.1 C3.2 C6.1 C7.1 C8.1 C9.1 C10.2 C11.2 C12.1 C13.1 C14.1 C15.1 C65.1 C66.1 C67.1 D4.1 D5.1 D9.1 D10.1 D11.1 D12.1 J1.2 J1.3 LCD1.5 LCD1.17 LCD1.19 LCD1.60 LCD1.61 LCD1.62 LCD1.63 LCD1.64 LCD1.65 LCD.15 R66.1 U2.2 | length 11.8
  Top Layer w0.7: v1(9.001,33.09) 10.774,33.09 v1(10.777,33.087) ; B1.15 28.473,33.833 28.473,35.223 v1(28.5,35.25) ; B1.9 36.079,33.819 v1(36.079,35.247) ; B3.4 67.906,13.346 68.904,13.346 v1(69,13.25) ; v1(72,14.75) 72.084,14.666 73.28,14.666 B3.6 ; v1(78.5,14.5) v1(80.75,14.5) ; v1(79.25,17.75) 79.25,16.952 79.275,16.927 B2.1 79.975,16.927 80,16.952 v1(80,17.75)
  other v1: 71.25,4 71.75,4 72.25,4 80.668,3.98 81.168,3.98 81.668,3.98 80.668,4.48 81.168,4.48 81.668,4.48 71.25,4.5 71.75,4.5 72.25,4.5 80.668,4.98 81.168,4.98 81.668,4.98 71.25,5 71.75,5 72.25,5 80.668,5.48 81.168,5.48 81.668,5.48 71.25,5.5 71.75,5.5 72.25,5.5 108.021,7.986 138.25,10.35 108.021,12.49 50.25,13 127.588,13.239 59.25,13.25 123.913,13.264 50.25,13.75 59.25,14 50.25,14.5 59.25,14.75 50.25,15.25 59.25,15.5 50.25,16 59.25,16 108.03,16.995 71.75,18.75 81.75,19 82.5,19 83.25,19 71.75,19.5 71.75,20.25 108.03,21.499 123.913,22.391 127.568,22.391 138.25,23.4 10.804,28.112 7.286,28.458 10.804,30.316 36.487,36.449 37.764,46.698 24.457,46.825 21.209,46.952 125.095,47.168 15.706,48.383
  other v2: 68.45,11.057
LCD_RS: B1.3 LCD.3 | length 56.5
  Top Layer w0.254: B1.3 29.718,25.601 29.867,25.75 32.739,25.75 32.888,25.601 32.888,22.228 47.5,7.616 72.366,7.616 73,8.25 74,8.25 74.25,8 74.25,7.263 LCD.3
LCD_SCL: B1.6 LCD.4 | length 50.8
  Top Layer w0.254: B1.6 33.528,22.222 47.75,8 72,8 72.75,8.75 74.25,8.75 74.5,8.5 74.722,8.278 LCD.4
LCD_SDA: B1.4 LCD.5 | length 54.2
  Top Layer w0.254: B1.4 30.988,23.012 47.146,6.854 72.146,6.854 73.554,5.446 74.446,5.446 75.222,6.222 LCD.5
NetB1_11: B1.11 R4.1 | length 13.8
  Top Layer w0.35: B1.11 33.528,43.18 35.56,45.212 R4.1
NetB1_12: B1.12 R7.1 | length 13.4
  Top Layer w0.35: B1.12 32.258,44.323 33.356,45.421 R7.1
NetB1_13: B1.13 R6.1 | length 13
  Top Layer w0.35: B1.13 30.988,46.573 R6.1
NetB1_14: B1.14 R5.1 | length 13.3
  Top Layer w0.35: R5.1 28.829,46.7 28.829,45.593 29.718,44.704 B1.14
NetB2_2: B2.2 R10.2 | length 2.2
  Top Layer w0.5: R10.2 77.478,15.616 79.588,15.616 B2.2
NetB2_4: B2.4 R12.2 | length 2.3
  Top Layer w0.5: R12.2 77.616,13.192 79.554,13.192 B2.4
NetB2_5: B2.5 B2.6 CON5.1 | length 6.1
  Top Layer w0.5: B2.6@85.053,14.078 B2.6
  Top Layer w1: B2.6@85.053,14.078 85.053,12.772 CON5.1
NetB2_7: B2.7 B2.8 CON1.1 | length 5.9
  Top Layer w1: 85.053,16.025 B2.8 85.141,16.927 88.135,19.921 88.135,20.46 CON1.1
NetB3_2: B3.2 R11.2 | length 2.8
  Top Layer w0.5: R11.2 65.736,16.199 66.749,16.199 67.037,15.911 B3.2
NetB3_3: B3.3 C13.2 R11.1 | length 5.1
  Top Layer w0.5: C13.2@65.386,11.495 R11.1 65.611,13.749 66.503,14.641 B3.3
NetB3_5: B3.5 R12.1 | length 2.4
  Top Layer w0.5: B3.5 R12.1
NetB3_7: B3.7 R10.1 | length 2.5
  Top Layer w0.5: B3.7 75.362,15.911 75.687,15.586 R10.1
NetC1_2: C1.2 LCD1.9 R3.2 | length 5.6
  Top Layer w0.254: C1.2 24.546,48.514 R3.2 26.67,48.514 27.118,48.962 LCD1.9@27.118,51.689
NetC17_1: C17.1 U8.1 | length 2.9
  Top Layer w0.5: C17.1 59.055,32.53 59.055,31.75 59.563,31.242 U8.1
NetC17_2: C17.2 L4.1 U8.6
NetC64_1: C64.1 U2.1 | length 2.2
  Top Layer w0.254: U2.1 9.897,34.778 10.893,35.774 C64.1
NetC64_2: C64.2 L2.1 U2.6
NetCON2_1: CON2.1 D1.1 D4.2 | length 15.2
  Top Layer w0.5: CON2.1 105.2,20.575 106.5,19.275 111.65,19.275 112.33,19.955 D4.2 D1.1
NetCON4_1: CON4.1 D2.1 D5.2 | length 14.3
  Top Layer w0.5: CON4.1 111.45,15.075 111.8,15.425 111.8,16.465 D5.2 D2.1
NetCON6_1: CON6.1 D6.1 D9.2 | length 14.7
  Top Layer w0.5: CON6.1 103.337,12.038 104.212,12.038 106.075,10.175 109.855,10.175 112.171,12.49 D9.2 D6.1
NetCON7_1: CON7.1 D7.1 D10.2 | length 17.4
  Top Layer w0.5: CON7.1 103.05,7.85 105.55,5.35 110.75,5.35 111.346,5.946 111.346,7.161 112.171,7.986 D10.2 D7.1
NetD11_2: D11.2 R9.1 | length 4.5
  Top Layer w0.5: R9.1 D11.2
NetD12_2: D12.2 R8.1 | length 3.8
  Top Layer w0.5: R8.1 D12.2
NetLCD1_10: LCD1.10 R5.2 | length 3.3
  Top Layer w0.35: R5.2 29.118,48.739 LCD1.10@29.118,51.689
NetLCD1_11: LCD1.11 R6.2 | length 3.2
  Top Layer w0.35: LCD1.11@31.118,51.689 31.118,48.519 R6.2
NetLCD1_12: LCD1.12 R7.2 | length 3.3
  Top Layer w0.35: LCD1.12@33.118,51.689 33.118,48.724 R7.2
NetLCD1_13: LCD1.13 R4.2 | length 3.4
  Top Layer w0.35: LCD1.13@35.118,51.689 35.118,48.886 35.518,48.486 R4.2
NetLCD1_21: LCD1.21 R1.1 | length 3.4
  Top Layer w0.5: LCD1.21@51.118,51.689 51.118,48.58 R1.1
NetLCD1_59: LCD1.59 R2.1 | length 3.1
  Top Layer w0.5: LCD1.59 127.528,50.018 127.845,49.701 127.845,48.815 R2.1
NetR21_1: R21.1 R22.2 U8.3 | length 4.4
  Top Layer w0.254: R21.1 R22.2 62.562,29.019 U8.3
NetR64_1: R64.1 R65.2 | length 2.1
  Top Layer w0.254: R64.1 7.286,36.031 R65.2
NetR65_1: R65.1 R66.2 U2.3 | length 4.7
  Top Layer w0.254: R66.2 R65.1 7.428,32.12 U2.3
VLCD: D3.1 J1.1 | length 8.4
  Top Layer w1: J1.1 14.763,14.778 17.75,17.765 D3.1
pads on no net: B1.7 LCD1.7 LCD1.8 LCD1.15 LCD1.16 LCD1.18 LCD1.20 LCD1.22 LCD1.23 LCD1.24 LCD1.25 LCD1.26 LCD1.27 LCD1.28 LCD1.29 LCD1.30 LCD1.31 LCD1.32 LCD1.33 LCD1.34 LCD1.35 LCD1.36 LCD1.37 LCD1.38 LCD1.39 LCD1.40 LCD1.41 LCD1.42 LCD1.43 LCD1.44 LCD1.45 LCD1.46 LCD1.47 LCD1.48 LCD1.49 LCD1.50 LCD1.51 LCD1.52 LCD1.53 LCD1.54 LCD1.55 LCD1.56 LCD1.57 LCD.8 LCD.9 LCD.10 LCD.11 LCD.12 LCD.13 LCD.14

## Polygon pours and split planes (outlines as drawn)
NetC64_2 on Top Layer "NONET_L-01_P-001" (solid, pour order 0): 11.731,33.524 14.779,33.524 14.779,40.255 11.731,40.255
+12 on Top Layer "NONET_L-01_P-001" (solid, pour order 1): 11.731,33.524 14.779,33.524 14.779,27.428 11.731,27.428
LCD_GND on Top Layer "NONET_L-01_P-001" (solid, pour order 9): 70,18.25 72.25,18.25 72.25,20.75 70,20.75
LCD_GND on Top Layer "NONET_L-01_P-001" (solid, pour order 7): 81.25,20.75 81.25,18.5 83.75,18.5 83.75,20.75
+12 on Top Layer "NONET_L-01_P-001" (solid, pour order 5): 61.214,36.703 61.214,33.401 65.659,33.401 65.659,36.703
+3.3 on Top Layer "NONET_L-01_P-001" (solid, pour order 4): 45.466,36.068 50.546,36.068 50.546,33.782 45.466,33.782
NetC17_2 on Top Layer "NONET_L-01_P-001" (solid, pour order 3): 54.483,36.195 60.96,36.195 60.96,33.528 54.483,33.528
+5 on Top Layer "NONET_L-01_P-001" (solid, pour order 2): 14.5,43.815 14.5,53.34 5.969,53.34 5.969,50.165 11,50.165 11,43.815
LCD_GND on Bottom Layer "NONET_L-01_P-001" (solid, remove dead copper, pour order 6): 0,53.5 0,0 150.371,0 150.373,0.002 150.366,0.008 150.366,53.464

## Keep-outs
Bottom Layer:
  lines w0.1: 49.319,50.167 52.897,50.167 ; 125.5,50.25 128.569,50.25 128.569,52.654 128.364,52.859 128.109,52.859 ; 101,7.75 105,7.75 105,22.5 101,22.5 101,7.75 ; 128.75,25.25 133.25,25.25 133.25,27.5 128.75,27.5 128.75,25.25
Keep-Out Layer:
  the board outline again, w0.1

## Silkscreen, mask and mechanical layers (free items; w line width, h text height)
Top Overlay:
  lines w0.1: 86.725,6.1 104.725,6.1 104.725,24.1 86.725,24.1 86.725,6.1
  text "Fedorov J." at 112.254,36.004 h1.52

## Text inside footprints (layer, text, board x,y; h text height)
LCD1: Bottom Overlay "Futaba GP1247AI 253x63 Dot" at 93.274,23.754 h1.52